# EAGLE board inc (EAGLE 9.5.1)
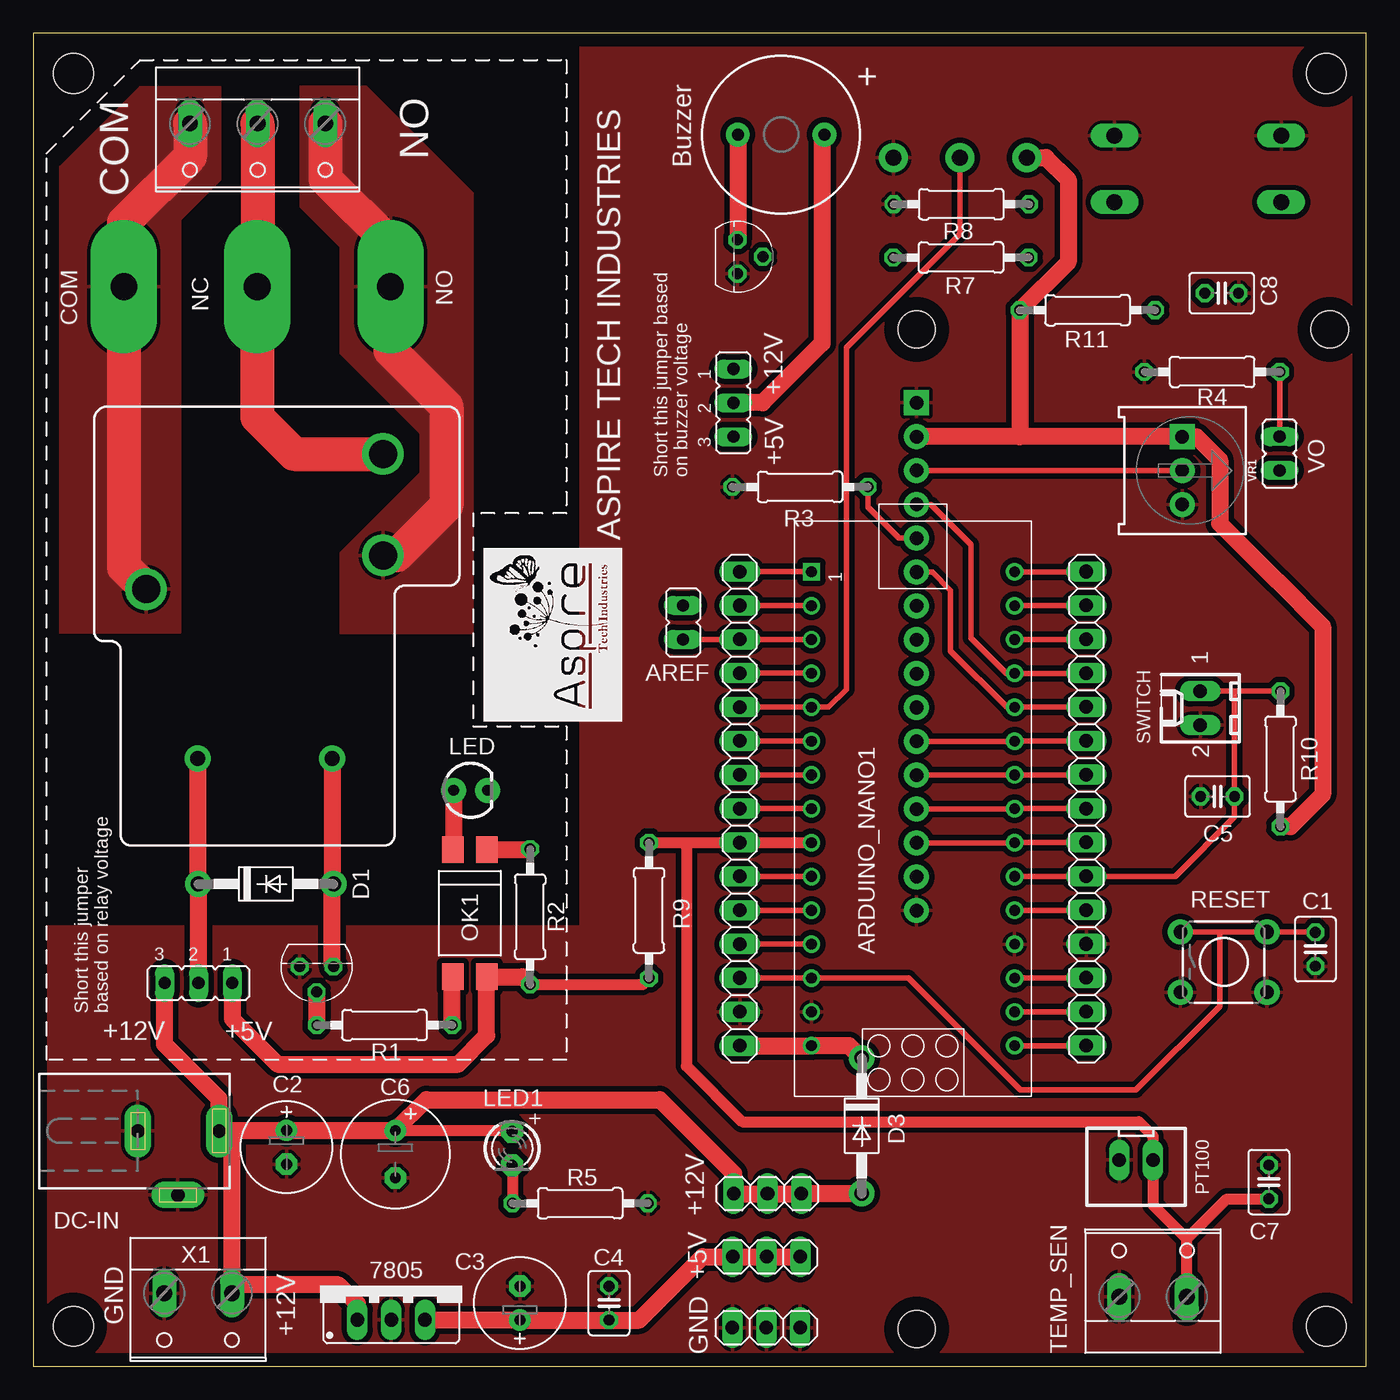
[diagram p0: board, top side]
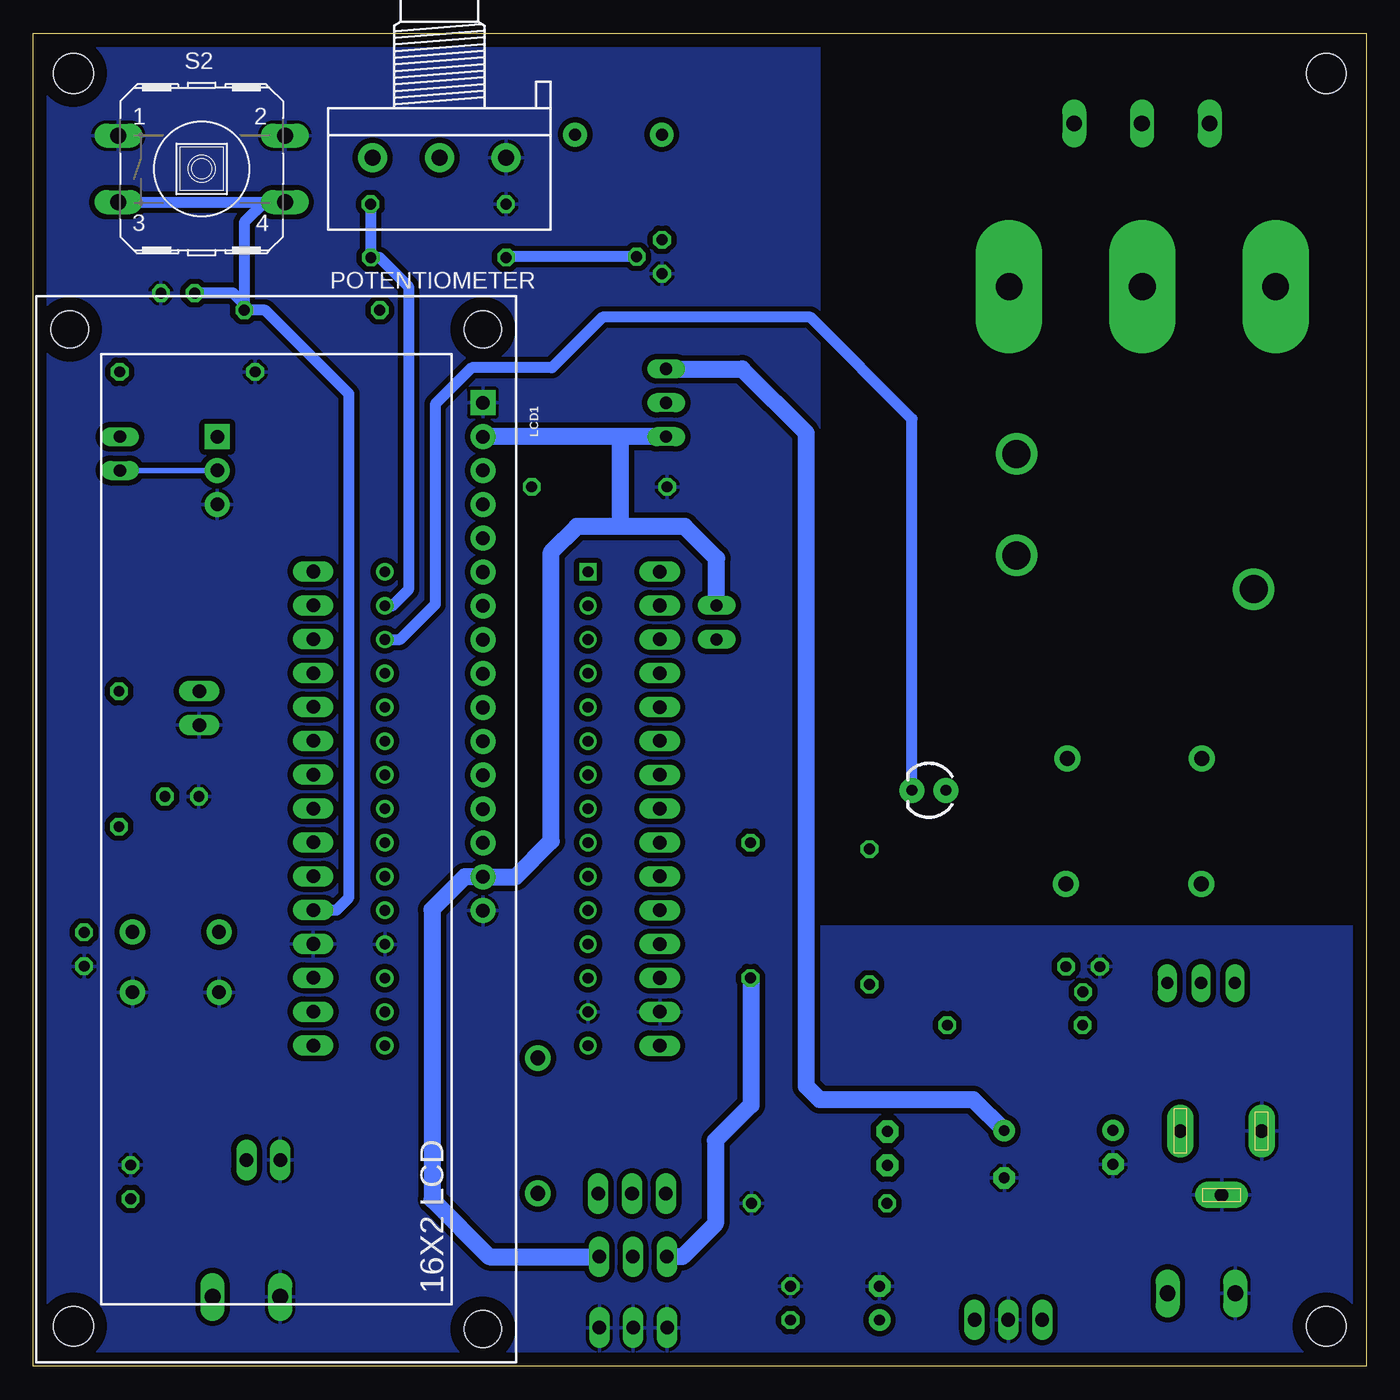
[diagram p1: board, bottom side, seen from below]

Size 100 x 100 mm. Coordinates in mm from the lower left corner, seen from the top.
Outline: 0,0 100,0 100,100 0,100 0,0
Copper layers (1*16): Top 0.035mm / dielectric 1.5mm / Bottom 0.035mm
Design rules "default": minimum track width 6mil, minimum drill 0.35mm, track to track 6mil, track to pad 6mil, pad to pad 6mil, via to via 6mil, smd to smd 6mil, copper to edge 40mil, drill to drill 6mil, minimum pad ring 10mil, minimum via ring 8mil, stop-mask expansion 4mil, vias tented up to drill 0mil, thermal gap 10mil
Holes 3 mm at 3,97 97,97 97,3 3,3

## Footprints (pad centres in the part's own frame; a part is rotated, then mirrored left to right if it is on the bottom)
ARDUINO_NANO = drill 0.8 square: 1 -20.32,-7.62 | drill 0.8: 2 -17.78,-7.62; 3 -15.24,-7.62; 4 -12.7,-7.62; 5 -10.16,-7.62; 6 -7.62,-7.62; 7 -5.08,-7.62; 8 -2.54,-7.62; 9 0,-7.62; 10 2.54,-7.62; 11 5.08,-7.62; 12 7.62,-7.62; 13 10.16,-7.62; 14 12.7,-7.62; 15 15.24,-7.62; 16 15.24,7.62; 17 12.7,7.62; 18 10.16,7.62; 19 7.62,7.62; 20 5.08,7.62; 21 2.54,7.62; 22 0,7.62; 23 -2.54,7.62; 24 -5.08,7.62; 25 -7.62,7.62; 26 -10.16,7.62; 27 -12.7,7.62; 28 -15.24,7.62; 29 -17.78,7.62; 30 -20.32,7.62
JP1 = drill 0.914 long: 1 0,-1.27; 2 0,1.27
C025-030X050 = drill 0.813 octagon: 1 -1.27,0; 2 1.27,0
E2,5-7 = drill 0.813 pad 1.6: + -1.27,0 | drill 0.813 pad 1.6 octagon: - 1.27,0
E3,5-8 = drill 0.813 pad 1.6: + -1.778,0 | drill 0.813 pad 1.6 octagon: - 1.778,0
LPAD1 = drill 2 pad 5 long: 1 0,0
DO41-10 = drill 1.118 pad 1.93: A 5.08,0; C -5.08,0
LED_3MM = drill 0.813 pad 1.88: A -1.27,0; K 1.27,0
78XXS = drill 1.016 long: GND 0,-2.54; IN -2.54,-2.54; OUT 2.54,-2.54
DCJ0303 = drill 1 pad 2 long: 1 0,3.1; 2 4.8,0; 3 0,-3
JP2 = drill 0.914 long: 1 -2.54,0; 2 0,0; 3 2.54,0
1X15 = drill 1.016 long: 1 -17.78,0; 2 -15.24,0; 3 -12.7,0; 4 -10.16,0; 5 -7.62,0; 6 -5.08,0; 7 -2.54,0; 8 0,0; 9 2.54,0; 10 5.08,0; 11 7.62,0; 12 10.16,0; 13 12.7,0; 14 15.24,0; 15 17.78,0
1X03 = drill 1.016 long: 1 -2.54,0; 2 0,0; 3 2.54,0
RELAY-T90 = drill 1.1 pad 1.956: COIL1 0,-13.9; COIL2 0,-3.81 | drill 2.1: MAIN -12.7,-17.78; NC -22.86,0; NO -15.24,0
LCD-16X2 = drill 1.016 pad 1.88 square: 1 -32,15.5 | drill 1.016 pad 1.88: 2 -29.46,15.5; 3 -26.92,15.5; 4 -24.38,15.5; 5 -21.84,15.5; 6 -19.3,15.5; 7 -16.76,15.5; 8 -14.22,15.5; 9 -11.68,15.5; 10 -9.14,15.5; 11 -6.6,15.5; 12 -4.06,15.5; 13 -1.52,15.5; 14 1.02,15.5; 15 3.56,15.5; 16 6.1,15.5 | hole 2.8: -37.5,15.5; 37.5,15.5; -37.5,-15.5
LED3MM = drill 0.813 pad 1.676 octagon: A -1.27,0; K 1.27,0
DIL4-SMD = smd 1.6 x 2: 1 -1.27,-4.77; 2 1.27,-4.77; 3 1.27,4.77; 4 -1.27,4.77
JST-XH-02-PACKAGE-LONG-PAD = drill 1.016 long: 1 -1.27,0; 2 1.27,0
TO92 = drill 0.813 octagon: 1 1.27,0; 2 0,1.905; 3 -1.27,0
0207/10 = drill 0.813 octagon: 1 -5.08,0; 2 5.08,0
3RP/1610N = drill 1.2 pad 2.184: 1 -5,0; 2 0,0; 3 5,0
W237-3E = drill 1.194 long: 1 -5.08,-0.635; 2 0,-0.635; 3 5.08,-0.635
TACTILE-PTH = drill 1.016 pad 1.88: 1 -3.251,2.261; 2 3.251,2.261; 3 -3.251,-2.261; 4 3.251,-2.261
B3F-40XX = drill 1.194 long: 1 -6.248,2.489; 2 6.248,2.489; 3 -6.248,-2.489; 4 6.248,-2.489
BUZZER-12MM = drill 0.9 pad 1.778: + 3.25,0; - -3.25,0
6410-02 = drill 1.016 long: 1 1.27,0; 2 -1.27,0
W237-132 = drill 1.194 long: 1 -2.54,-0.635; 2 2.54,-0.635
TRIMPOT-PTH-3386U = drill 1.016 pad 1.88 square: 1 -2.54,-0.015 | drill 1.016 pad 1.88: 2 0,-0.015; 3 2.54,-0.015

## Placement (x,y rotation side)
ARDUINO_NANO1  [ARDUINO_NANO]  66,39.28 270 top
AREF  [JP1]  48.74,55.8 0 top
C1  0.01uF  [C025-030X050]  96.19,31.28 270 top
C2  47uF  [E2,5-7]  19,16.42 270 top
C3  22uF  [E2,5-7]  36.51,4.73 90 top
C4  0.1uF  [C025-030X050]  43.19,4.73 90 top
C5  0.01uF  [C025-030X050]  88.85,42.74 180 top
C6  220uF  [E3,5-8]  27.16,15.9 270 top
C7  0.01uF  [C025-030X050]  92.7,13.82 90 top
C8  0.01uF  [C025-030X050]  89.16,80.51 0 top
COM  LPAD1  [LPAD1]  6.8,81 0 top
D1  1N4004  [DO41-10]  17.45,36.18 0 top
D2  [LED_3MM]  32.8,43.21 0 top
D3  1N4004  [DO41-10]  62.15,18.04 270 top
IC1  [78XXS]  26.85,6.02 0 top
J4  [DCJ0303]  10.84,17.65 270 top
JP1  [JP2]  12.39,28.75 180 top
JP3  [1X15]  79,41.84 90 top
JP4  [1X15]  53,41.83 90 top
JP5  [1X03]  55.08,12.95 180 top
JP6  [1X03]  55.01,8.21 180 top
JP7  [1X03]  54.99,2.89 0 top
JP8  [JP2]  52.52,72.28 270 top
K1  RELAY-SPDT-JQX-15F  [RELAY-T90]  26.23,45.59 270 top
LCD1  LCD-16X2SILK  [LCD-16X2]  81.77,40.28 270 bottom
LED1  [LED3MM]  35.92,16.34 270 top
NC  LPAD1  [LPAD1]  16.8,81 0 top
NO  LPAD1  [LPAD1]  26.8,81 0 top
OK1  SFH6206  [DIL4-SMD]  32.75,33.99 180 top
PT100  JST-XH-02-PIN-LONG-PAD  [JST-XH-02-PACKAGE-LONG-PAD]  82.74,15.47 180 top
Q1  BC547  [TO92]  52.83,83.24 270 top
R1  100E  [0207/10]  26.35,25.59 180 top
R2  100E  [0207/10]  37.27,33.72 270 top
R3  100E  [0207/10]  57.53,65.97 180 top
R4  100E  [0207/10]  88.44,74.6 0 top
R5  1k  [0207/10]  41.03,12.22 180 top
R7  100E  [0207/10]  69.6,83.18 180 top
R8  1k  [0207/10]  69.62,87.18 180 top
R9  430E  [0207/10]  46.19,34.2 270 top
R10  1K  [0207/10]  93.57,45.56 270 top
R11  100E  [0207/10]  79.09,79.23 180 top
R12  [3RP/1610N]  69.53,90.67 180 bottom
RELAY  [W237-3E]  16.83,92.6 180 top
S1  [TACTILE-PTH]  89.31,30.32 0 top
S2  [B3F-40XX]  87.37,89.83 0 bottom
SG2  BUZZERPTH  [BUZZER-12MM]  56.1,92.4 0 top
SWITCH  22-27-2021-02  [6410-02]  87.55,49.37 90 top
T1  BC547  [TO92]  21.25,29.98 180 top
TEMP_SEN  [W237-132]  84.01,5.83 0 top
VO  [JP1]  93.5,68.47 180 top
VR1  10k  [TRIMPOT-PTH-3386U]  86.21,67.2 270 top
X1  [W237-132]  12.36,4.82 180 top

## Library data of the parts
ARDUINO_NANO1 = ArduinoNanoV30
AREF JP8 VO = jumper
C1-C8 = rcl; SPICEPREFIX: C
COM NC NO = LPAD1
D1 D3 LED1 = adafruit
D2 = SparkFun-LED; PROD_ID: DIO-08794
IC1 = v-reg
J4 = con-jack; OC_FARNELL: unknown; OC_NEWARK: unknown
JP1 = hacesoft
JP3-JP7 = pinhead
K1 = SparkFun-Electromechanical; PROD_ID: COMP-10736; SF_SKU: COM-10924
LCD1 = SparkFun-Displays; PROD_ID: LCD-12633; SF_ID: LCD-00255
OK1 = optocoupler; MF: VISHAY/TELEFUNKEN; MPN: SFH6206-3; OC_FARNELL: 1469585; OC_NEWARK: 58K2214
PT100 = Rembrandt Electronics - JST XH Connectors v1-0
Q1 = transistor-npn
R1-R5 R7-R11 = rcl; SPICEPREFIX: R
R12 = pot
RELAY TEMP_SEN X1 = con-wago-508; OC_FARNELL: unknown; OC_NEWARK: unknown
S1 = SparkFun-Retired
S2 = switch-omron; MF: OMRON COMPONENTS USA; MPN: B3F-4000; OC_FARNELL: 176434; OC_NEWARK: 36K3105
SG2 = SparkFun
SWITCH = con-molex; MF: MOLEX; OC_FARNELL: unknown; OC_NEWARK: unknown
T1 = transistor
VR1 = SparkFun-Resistors; PROD_ID: RES-09730; SF_SKU: COM-09806

## Nets
+5V: AREF.2 C3.+ C4.1 IC1.OUT JP1.1 JP6.1 JP6.2 JP6.3 JP8.3 LCD1.2 LCD1.15 OK1.4 R2.2 R9.2 R10.2 R11.2 R12.3 VR1.1
+12V: C2.+ C6.+ D3.A IC1.IN J4.1 JP1.3 JP5.1 JP5.2 JP5.3 JP8.1 LED1.A X1.1
BUTTON: ARDUINO_NANO1.20 C8.1 JP3.5 R11.1 S2.3 S2.4
BUZZ: ARDUINO_NANO1.29 JP3.14 R7.1 R8.1
DATA1: ARDUINO_NANO1.25 JP3.10 LCD1.11
DATA2: ARDUINO_NANO1.24 JP3.9 LCD1.12
DATA3: ARDUINO_NANO1.23 JP3.8 LCD1.13
DATA4: ARDUINO_NANO1.22 JP3.7 LCD1.14
EN: ARDUINO_NANO1.26 JP3.11 LCD1.6
GND: ARDUINO_NANO1.14 ARDUINO_NANO1.19 C1.2 C2.- C3.- C4.2 C5.2 C6.- C7.2 C8.2 IC1.GND J4.2 J4.3 JP3.4 JP4.2 JP7.1 JP7.2 JP7.3 LCD1.1 LCD1.16 PT100.2 Q1.1 R3.2 R4.1 R5.1 R8.2 R12.1 S1.3 S1.4 S2.1 S2.2 SWITCH.2 T1.1 TEMP_SEN.1 VR1.3 X1.2
N$1: D1.C JP1.2 K1.COIL1
N$2: D1.A K1.COIL2 T1.3
N$3: R1.2 T1.2
N$4: OK1.3 R1.1
N$6: OK1.1 R2.1
N$7: D2.A OK1.2
N$8: ARDUINO_NANO1.4 JP4.12
N$10: LCD1.5 R3.1
N$11: LCD1.3 VO.2 VR1.2
N$12: ARDUINO_NANO1.16 JP3.1
N$13: R4.2 VO.1
N$14: ARDUINO_NANO1.17 JP3.2
N$15: ARDUINO_NANO1.18 JP3.3
N$20: ARDUINO_NANO1.30 JP3.15
N$21: ARDUINO_NANO1.12 JP4.4
N$22: ARDUINO_NANO1.11 JP4.5
N$23: ARDUINO_NANO1.10 JP4.6
N$25: ARDUINO_NANO1.8 JP4.8
N$26: ARDUINO_NANO1.7 JP4.9
N$27: ARDUINO_NANO1.6 JP4.10
N$30: ARDUINO_NANO1.3 AREF.1 JP4.13
N$31: ARDUINO_NANO1.2 JP4.14
N$32: ARDUINO_NANO1.1 JP4.15
N$33: LED1.K R5.2
N$35: JP8.2 SG2.+
N$36: Q1.3 SG2.-
N$37: Q1.2 R7.2
POTIN: ARDUINO_NANO1.5 JP4.11 R12.2
RCOM: COM.1 K1.MAIN RELAY.3
RELAY_SIG: ARDUINO_NANO1.28 D2.K JP3.13
RESET: ARDUINO_NANO1.13 C1.1 JP4.3 S1.1 S1.2
RNC: K1.NC NC.1 RELAY.2
RNO: K1.NO NO.1 RELAY.1
RS: ARDUINO_NANO1.27 JP3.12 LCD1.4
SWITCH: ARDUINO_NANO1.21 C5.1 JP3.6 R10.1 SWITCH.1
TEMP_SIG: ARDUINO_NANO1.9 C7.1 JP4.7 PT100.1 R9.1 TEMP_SEN.2
VIN: ARDUINO_NANO1.15 D3.C JP4.1

## Tracks (layer width: path | path; a pad name or v marks a point on that pad's centre or on a via)
+5V
  Top 0.813: R2.2 45.71,28.64 R9.2
  Top 1.27: R2.2 36.69,29.22 OK1.4 34.02,24.81 31.87,22.66 18.34,22.66 14.93,26.07 JP1.1 | IC1.OUT 36.49,3.48 C3.+ C4.1 45.46,3.46 50.21,8.21 JP6.3 JP6.2 JP6.1 | R10.2 94.33,40.48 96.74,42.89 96.74,55.51 93.28,58.97 93.26,58.97 89,63.23 89,68 87.26,69.74 VR1.1 74.01,69.74 | R12.3 75.98,90.67 77.64,89.01 77.64,82.85 R11.2 74.01,69.74 | 74.01,69.74 LCD1.2
  Bottom 1.27: JP6.1 65.8,8.21 70.1,12.51 70.1,34.26 67.64,36.72 LCD1.15 63.81,36.72 61.14,39.39 61.14,61.07 59.21,63 56,63 | JP8.3 56,69.74 | 56,69.74 LCD1.2 | AREF.2 48.74,60.61 51.13,63 56,63 | 56,69.74 56,63 | R9.2 46.15,29.08 46.15,19.6 48.82,16.93 48.82,10.7 51.31,8.21 JP6.3
+12V
  Top 0.813: C6.+ 35.85,17.68 LED1.A
  Top 1.27: 14.9,17.69 13.94,17.69 J4.1 13.94,20.06 9.85,24.15 JP1.3 | 14.9,17.69 C2.+ C6.+ 29.48,20 47,20 52.54,14.46 JP5.3 JP5.2 JP5.1 D3.A | 14.9,17.69 X1.1 14.9,6.09 22.91,6.09 24.31,4.69 IC1.IN
  Bottom 1.27: JP8.1 46.82,74.82 42,70 42,21 41,20 29.48,20 C6.+
BUTTON
  Top 0.406: ARDUINO_NANO1.20 78.98,34.2 JP3.5
  Bottom 0.813: R11.1 84.17,85.83 82.66,87.34 S2.4 S2.3 | R11.1 84.17,79.67 85.01,80.51 C8.1 | R11.1 82.59,79.23 76.31,72.95 76.31,35.17 77.26,34.22 JP3.5
BUZZ
  Top 0.406: ARDUINO_NANO1.29 78.98,57.06 JP3.14
  Bottom 0.813: R8.1 74.7,83.2 R7.1 74.03,83.18 71.86,81.01 71.86,58.26 73.06,57.06 ARDUINO_NANO1.29
DATA1
  Top 0.406: LCD1.11 73.6,46.88 ARDUINO_NANO1.25 73.64,46.92 JP3.10
DATA2
  Top 0.406: LCD1.12 73.6,44.34 ARDUINO_NANO1.24 78.98,44.36 JP3.9
DATA3
  Top 0.406: LCD1.13 73.6,41.8 ARDUINO_NANO1.23 73.64,41.84 JP3.8
DATA4
  Top 0.406: JP3.7 78.98,39.28 ARDUINO_NANO1.22 73.6,39.26 LCD1.14
EN
  Top 0.406: JP3.11 78.98,49.44 ARDUINO_NANO1.26 73.03,49.44 68.82,53.65 68.82,58.2 67.44,59.58 LCD1.6
GND
  pour Bottom (isolate 0.406, rank 3): 41,33 41,109 105,109 105,-4 -6,-4 -6,33
  pour Top (isolate 0.406, rank 3): 41,114 41,33 -17,33 -17,-8 110,-8 110,114
N$1
  Top 1.27: K1.COIL1 12.33,36.22 D1.C 12.37,28.77 JP1.2
N$2
  Top 1.27: K1.COIL2 22.42,36.29 | 22.42,36.29 D1.A | T1.3 22.42,30.08 22.42,36.29
N$3
  Top 1.27: T1.2 21.25,25.61 R1.2
N$4
  Top 1.27: R1.1 31.43,29.17 OK1.3
N$6
  Top 1.27: OK1.1 37.23,38.76 R2.1
N$7
  Top 1.27: D2.A 31.53,38.81 OK1.2
N$8
  Top 0.406: JP4.12 ARDUINO_NANO1.4
N$10
  Top 0.406: LCD1.5 64.94,62.12 62.61,64.45 R3.1
N$11
  Top 0.406: LCD1.3 VR1.2
  Bottom 0.406: VR1.2 VO.2
N$12
  Top 0.406: ARDUINO_NANO1.16 78.98,24.04 JP3.1
N$13
  Top 0.406: R4.2 93.52,69.76 VO.1
N$14
  Top 0.406: ARDUINO_NANO1.17 78.98,26.58 JP3.2
N$15
  Top 0.406: ARDUINO_NANO1.18 78.98,29.12 JP3.3
N$20
  Top 0.406: ARDUINO_NANO1.30 78.98,59.6 JP3.15
N$21
  Top 0.406: JP4.4 ARDUINO_NANO1.12
N$22
  Top 0.406: JP4.5 ARDUINO_NANO1.11
N$23
  Top 0.406: JP4.6 ARDUINO_NANO1.10
N$25
  Top 0.406: JP4.8 ARDUINO_NANO1.8
N$26
  Top 0.406: JP4.9 ARDUINO_NANO1.7
N$27
  Top 0.406: JP4.10 ARDUINO_NANO1.6
N$30
  Top 0.406: ARDUINO_NANO1.3 JP4.13 AREF.1
N$31
  Top 0.406: ARDUINO_NANO1.2 JP4.14
N$32
  Top 0.406: JP4.15 ARDUINO_NANO1.1
N$33
  Top 0.813: LED1.K 35.95,15.04 R5.2
N$35
  Top 1.27: SG2.+ 59.17,92.22 59.17,76.74 54.71,72.28 JP8.2
N$36
  Top 1.27: SG2.- 52.85,84.53 Q1.3
N$37
  Bottom 0.813: Q1.2 64.46,83.24 R7.2
POTIN
  Top 0.406: JP4.11 ARDUINO_NANO1.5 59.67,49.44 61,50.77 61,76.4 69.53,84.93 R12.2
RCOM
  Top 2.54: RELAY.3 11.75,90.75 6.8,85.8 COM.1 6.8,59.94 K1.MAIN
  pour Top: 8,96 14,96 14,89 11,86 11,55 2,55 2,90
RELAY_SIG
  Top 0.406: ARDUINO_NANO1.28 78.98,54.52 JP3.13
  Bottom 0.813: ARDUINO_NANO1.28 72.48,54.52 69.84,57.16 69.84,72.17 67.1,74.91 61.09,74.91 57.31,78.69 41.69,78.69 34.07,71.07 D2.K
RESET
  Top 0.406: JP4.3 ARDUINO_NANO1.13 65.66,29.12 74.06,20.72 82.72,20.72 89,27 89,32.58 | S1.1 89,32.58 | 89,32.58 S1.2 96.19,32.58 C1.1
RNC
  Top 2.54: K1.NC 19.55,68.45 16.8,71.2 NC.1 16.83,81.03 RELAY.2
RNO
  Top 2.54: K1.NO 27.25,60.83 31,64.58 31,72 26.8,76.2 NO.1 26.8,84.2 21.91,89.09 RELAY.1
  pour Top: 20,96 20,87 23,84 23,76 29,70 29,67 23,61 23,55 33,55 33,88 25,96
RS
  Top 0.406: JP3.12 78.98,51.98 ARDUINO_NANO1.27 73.02,51.98 70.35,54.65 70.35,61.65 67.34,64.66 LCD1.4
SWITCH
  Top 0.406: ARDUINO_NANO1.21 78.98,36.74 JP3.6 85.67,36.76 90.12,41.21 C5.1 90.12,50.64 | SWITCH.1 90.12,50.64 | 90.12,50.64 R10.1
TEMP_SIG
  Top 0.813: TEMP_SEN.2 86.55,9.55 | C7.1 89.55,12.55 86.55,9.55 | 86.55,9.55 84.01,12.09 PT100.1 84.01,17.27 82.93,18.35 53.18,18.35 49,22.53 49,39 48.72,39.28 R9.1 JP4.7 ARDUINO_NANO1.9
VIN
  Top 1.27: JP4.1 ARDUINO_NANO1.15 61.23,24.04 D3.C

## Text on the board
tPlace: ASPIRE TECH INDUSTRIES
tNames: + | NO | Buzzer | COM | +12V | +5V | Short this jumper based / on buzzer voltage | LED | RESET | Short this jumper / based on relay voltage | +12V | +5V | +12V | DC-IN | 7805 | +5V | GND | +12V | GND
bNames: POTENTIOMETER | 16X2 LCD